# Altium PCB EG701_BMS.PcbDoc (part 1 of 2)
Units mm, origin at the board's own origin, x right, y up, seen from the top; angles counter-clockwise.
Board outline 90 x 50 mm, 2 copper layers (Top Layer, Bottom Layer); 94 components, 53 nets, 237 pads, 123 vias.
Unrouted connection lines stored in the file: 37.
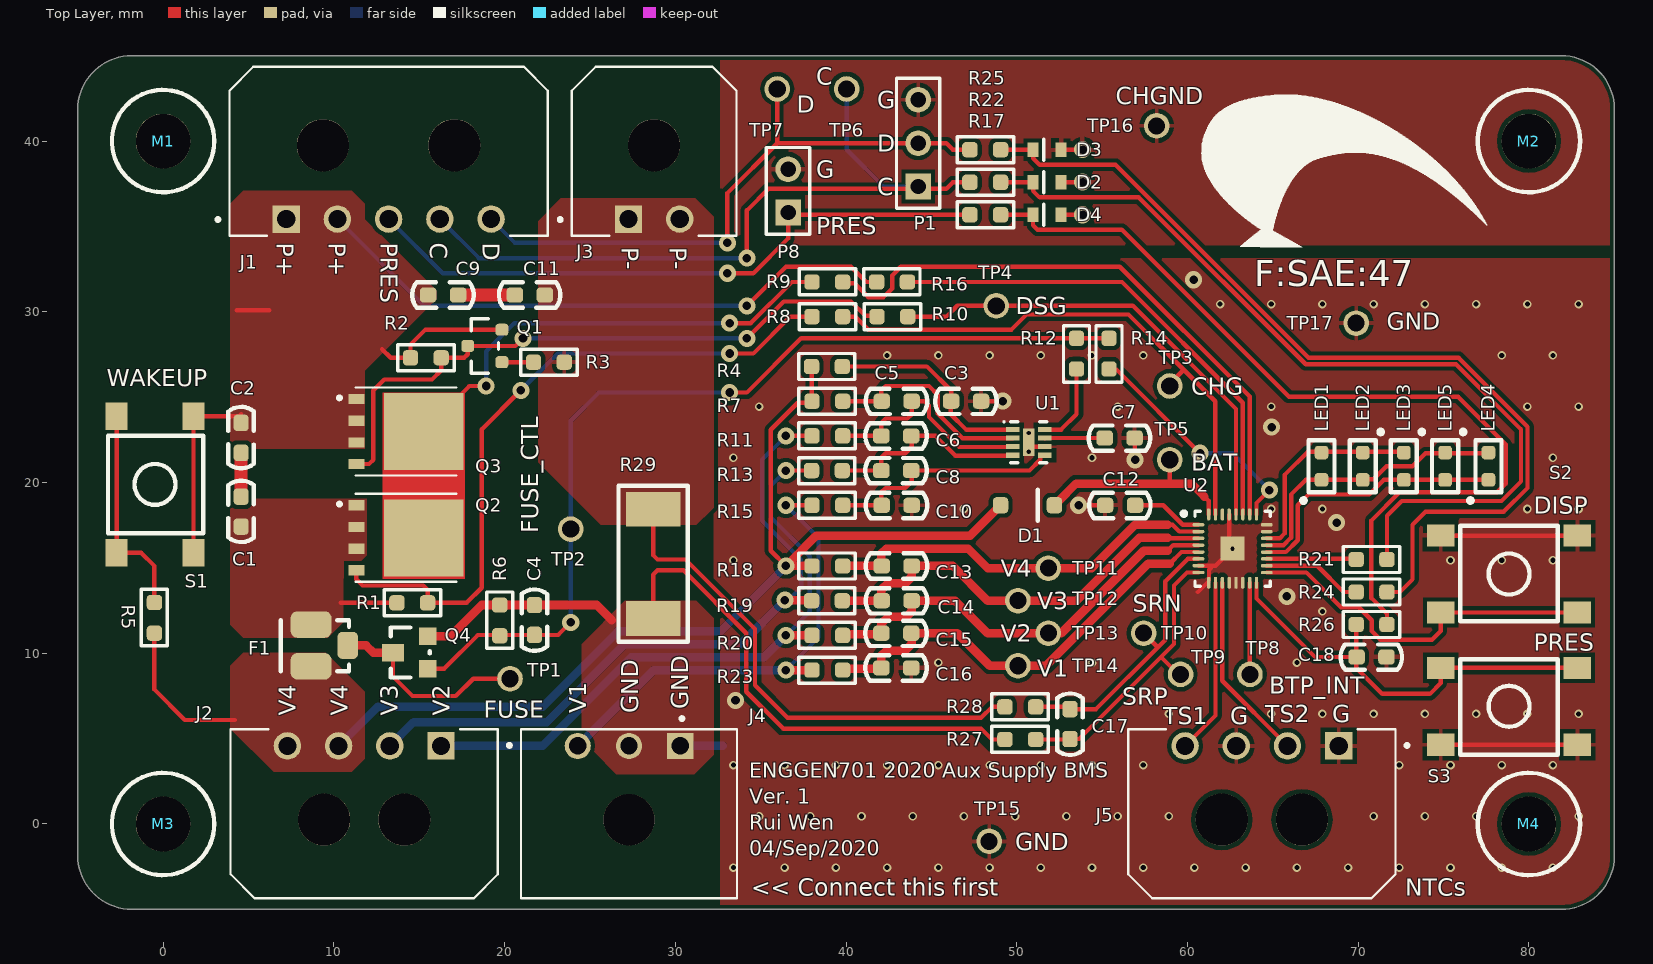
[diagram p0: Top Layer view]
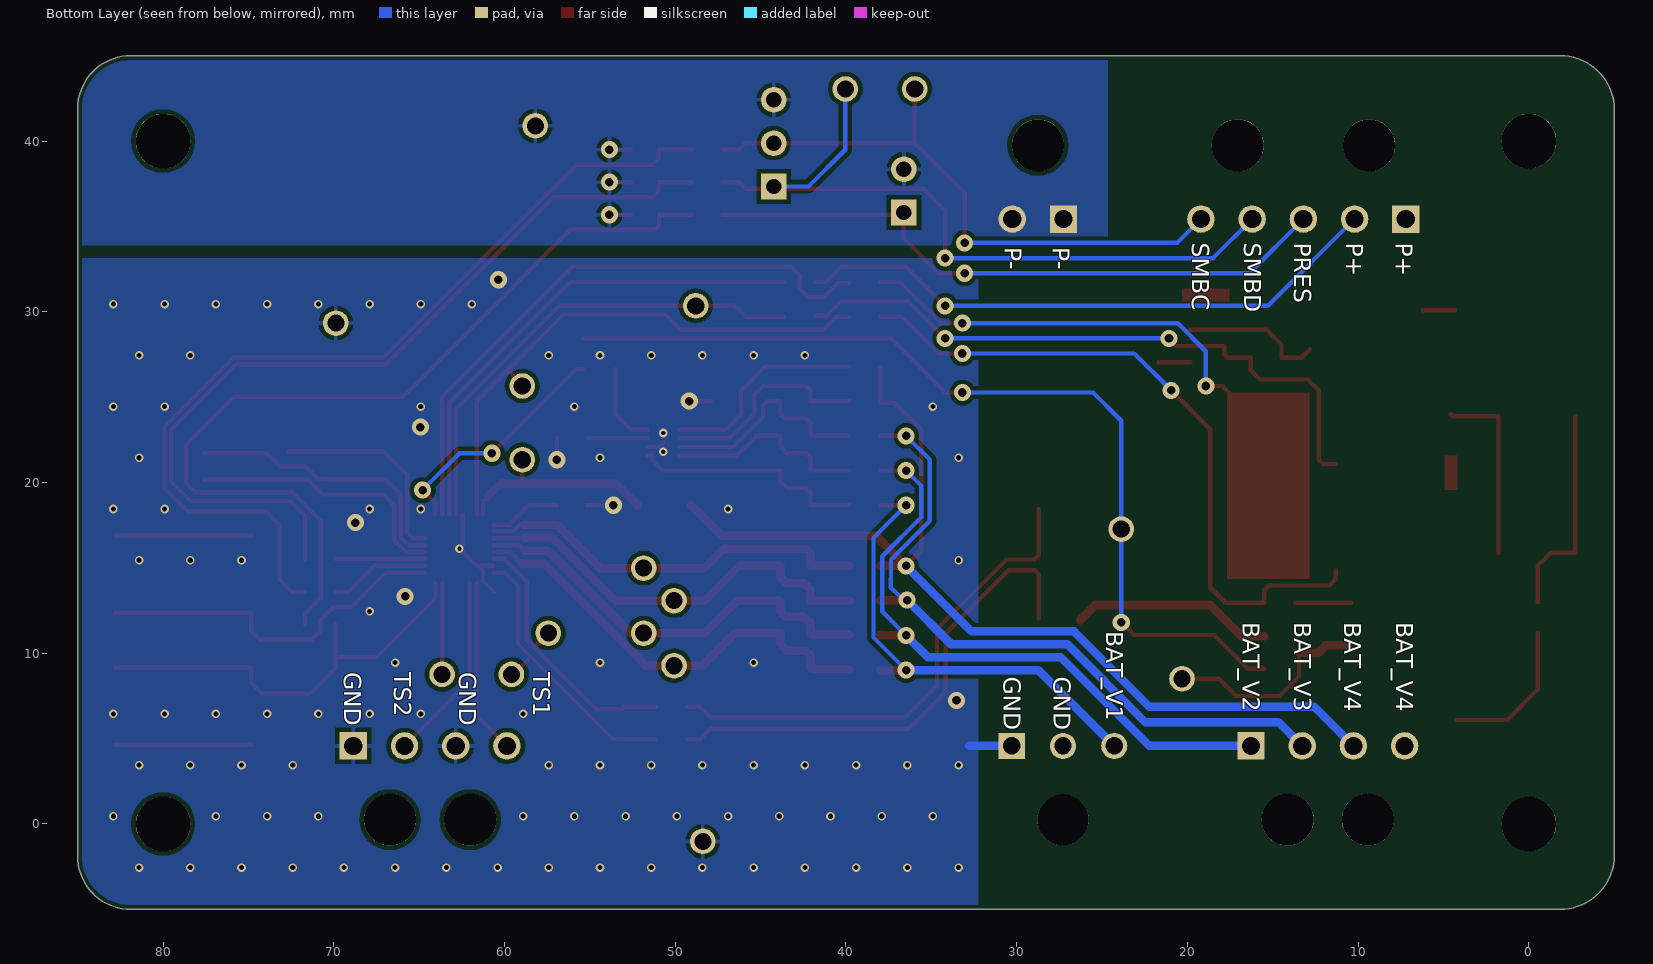
[diagram p1: Bottom Layer view, seen from below]

## Layer stack, top to bottom
Top Solder: solder mask 0.0102, Solder Resist, Dk 3.5
Top Layer: signal copper 0.0356
Dielectric 1: dielectric 0.32, FR-4, Dk 4.8
Bottom Layer: signal copper 0.0356
Bottom Solder: solder mask 0.0102, Solder Resist, Dk 3.5

## Board outline
-5,-1.825 -5,41.83 cw(c-1.83,41.83) -1.83,45 81.906,45 cw(c81.906,41.906) 85,41.906 85,-1.901 cw(c81.901,-1.901) 81.901,-5 -1.825,-5 cw(c-1.825,-1.825)

## Design rules (kind name [scope] priority, off if disabled: settings)
BoardOutlineClearance [All] p1: gap=0.254 ignorepadtopadclearanceinfootprint=FALSE except(0: Arc-SplitContinuation Track-SplitContinuation SMDPad-SplitContinuation THPad-SplitContinuation Via-SplitContinuation Fill-SplitContinuation Poly-SplitContinuation Region-SplitContinuation Text-SplitContinuation)
Clearance [All] p1: gap=0.254 ignorepadtopadclearanceinfootprint=FALSE except(0: Arc-Hole Track-Hole SMDPad-Hole THPad-Hole Via-Hole Fill-Hole Poly-Hole Region-Hole Text-Hole; 0.127: Arc-Arc Arc-Track Arc-SMDPad Track-Track Track-SMDPad SMDPad-SMDPad; 0.54: THPad-THPad)
PolygonConnect Relief_Power [InNet('BAT_V4') OR InNet('NetC1_1') OR InNet('NetC1_2') OR InNet('NetQ2_5') OR InNet('PACK+') OR     (InNet('GND') AND (InComponent('J4') OR InComponent('U1') OR InComponent('U2') OR InComponent('R29') OR IsVia))  OR   InNet('CHGND') AND (InComponent('J3') OR InComponent('C11') OR InComponent('R29'))] p1: connectstyle=Direct reliefconductorwidth=0.254 reliefentries=4 polygonreliefangle="90 Angle" airgapwidth=0.254
PolygonConnect [All] p2: connectstyle=Relief reliefconductorwidth=0.254 reliefentries=4 polygonreliefangle="90 Angle" airgapwidth=0.254
RoutingVias [All] p1: holewidth=0.711 width=1.27 viastyle="Through Hole" minholewidth=0.711 minwidth=1.27 maxholewidth=0.711 maxwidth=1.27
SolderMaskExpansion [All] p1: expansion=0.102
Width Width_FUSE [InNet('NetF1_2')] p1: maxlimit=0.5 minlimit=0.254 preferedwidth=0.254
Width Width_BAT [InNet('GND') OR InNet('BAT_V1') OR InNet('BAT_V2') OR InNet('BAT_V3') OR InNet('BAT_V4') OR InNet('VC1') OR InNet('VC2') OR InNet('VC3') OR InNet('VC4') OR InNet('BAT')] p2: maxlimit=0.5 minlimit=0.254 preferedwidth=0.254
Width [All] p3: maxlimit=0.254 minlimit=0.254 preferedwidth=0.254
30 further rules are at their usual default settings.

## Components (designator, comment, footprint, x,y, rotation, side; value= is the part's Value field where it differs from the comment)
C1 "100nF 50V" C0603_GENERIC 4.572,17.424 r90 top
C2 "100nF 50V" C0603_GENERIC 4.572,21.742 r90 top
C3 "100nF 50V" C0603_GENERIC 47.912,24.765 r180 top
C4 "100nF 50V" C0603_GENERIC 21.75,12.827 r270 top
C5 "100nF 16V" C0603_GENERIC 43.848,24.765 r180 top
C6 "100nF 16V" C0603_GENERIC 43.823,22.733 r180 top
C7 "100nF 50V" C0603_GENERIC 56.904,22.606 r180 top
C8 "100nF 16V" C0603_GENERIC 43.823,20.701 r180 top
C9 "100nF 50V" C0603_GENERIC 17.28,30.988 r180 top
C10 "100nF 16V" C0603_GENERIC 43.848,18.669 r180 top
C11 "100nF 50V" C0603_GENERIC 22.36,30.988 r180 top
C12 "2.2uF 25V" C0603_GENERIC 56.929,18.669 r180 top
C13 "100nF 16V" C0603_GENERIC 43.848,15.113 r180 top
C14 "100nF 16V" C0603_GENERIC 43.848,13.081 r180 top
C15 "100nF 16V" C0603_GENERIC 43.823,11.176 r180 top
C16 "100nF 16V" C0603_GENERIC 43.823,9.144 r180 top
C17 "100nF 16V" C0603_GENERIC 53.119,6.731 r270 top
C18 "DNP" C0603_GENERIC 71.658,9.779 r180 top
D1 "BAT46W-7-F" SOD-123_GENERIC 49.055,18.669 r0 top
D2 "MM3Z5V6ST1G" SOD_323_GENERIC 52.589,37.592 r180 top
D3 "MM3Z5V6ST1G" SOD_323_GENERIC 52.589,39.497 r180 top
D4 "MM3Z5V6ST1G" SOD_323_GENERIC 52.589,35.687 r180 top
F1 "Chemical fuse" ITV4030Lxxxx 8.669,11.684 r180 top
J1 "Micro-Fit RA HDR" 436500500 13.21,35.433 r180 top
J2 "Micro-Fit RA HDR" 436500400 16.281,4.574 r0 top
J3 "Micro-Fit RA HDR" 436500200 27.259,35.433 r180 top
J4 "Micro-Fit RA HDR" 436500300 30.29,4.572 r0 top
J5 "Micro-Fit RA HDR" 436500400 68.859,4.574 r0 top
LED1 "GREEN" LED_0603_GENERIC 67.851,20.955 r90 top
LED2 "GREEN" LED_0603_GENERIC 70.264,20.955 r270 top
LED3 "GREEN" LED_0603_GENERIC 72.677,20.955 r270 top
LED4 "GREEN" LED_0603_GENERIC 77.63,20.955 r90 top
LED5 "GREEN" LED_0603_GENERIC 75.09,20.955 r270 top
M1 "M3 Non-plated" M3_NONPLATED_GENERIC 0,40 r0 top locked
M2 "M3 Non-plated" M3_NONPLATED_GENERIC 80,40 r0 top locked
M3 "M3 Non-plated" M3_NONPLATED_GENERIC 0,0 r0 top locked
M4 "M3 Non-plated" M3_NONPLATED_GENERIC 80,0 r0 top locked
P1 "Header 3" HDR3_3D 44.229,37.338 r90 top
P8 "Header 2" HDR1X2 36.609,35.814 r90 top
Q1 "2N7002ET1G" SOT-23_GENERIC#1 17.845,28.001 r0 top
Q2 "BSC093N04LSG" TDSON-8 14.223,16.764 r0 top
Q3 "BSC093N04LSG" TDSON-8 14.223,22.987 r0 top
Q4 "PMV40UN2R" SOT-23_GENERIC#2 15.494,9.093 r90 top
R1 "1M" R0603_GENERIC 15.494,12.954 r180 top
R2 "1M" R0603_GENERIC 16.289,27.305 r180 top
R3 "10K" R0603_GENERIC 23.495,27.051 r180 top
R4 "100R" R0603_GENERIC 37.984,26.797 r0 top
R5 "10K" R0603_GENERIC -0.508,12.976 r270 top
R6 "51K" R0603_GENERIC 19.718,12.827 r270 top
R7 "1K" R0603_GENERIC 38.006,24.765 r0 top
R8 "5.1K" R0603_GENERIC 39.806,29.718 r180 top
R9 "100R" R0603_GENERIC 39.806,31.75 r180 top
R10 "5.1K" R0603_GENERIC 43.616,29.718 r180 top
R11 "1K" R0603_GENERIC 38.006,22.733 r0 top
R12 "5.1K" R0603_GENERIC 53.5,26.648 r90 top
R13 "1K" R0603_GENERIC 37.984,20.701 r0 top
R14 "5.1K" R0603_GENERIC 55.405,26.648 r90 top
R15 "1K" R0603_GENERIC 38.006,18.669 r0 top
R16 "10K" R0603_GENERIC 41.794,31.75 r0 top
R17 "1K" R0603_GENERIC 49.055,35.687 r180 top
R18 "100R" R0603_GENERIC 38.006,15.113 r0 top
R19 "100R" R0603_GENERIC 37.984,13.081 r0 top
R20 "100R" R0603_GENERIC 38.006,11.049 r0 top
R21 "200R" R0603_GENERIC 69.883,15.494 r0 top
R22 "100R" R0603_GENERIC 49.055,37.592 r180 top
R23 "100R" R0603_GENERIC 38.006,9.017 r0 top
R24 "200R" R0603_GENERIC 69.883,13.589 r0 top
R25 "100R" R0603_GENERIC 49.055,39.497 r180 top
R26 "200R" R0603_GENERIC 69.883,11.684 r0 top
R27 "100R" R0603_GENERIC 49.309,4.953 r0 top
R28 "100R" R0603_GENERIC 49.309,6.858 r0 top
R29 "1mR 50ppm" R2512_M_GENERIC 28.702,15.24 r90 top
S1 "SMT Tact Switch" 41-KRSM6-1 -2.722,23.892 r90 top
S2 "SMT Tact Switch" 41-KRSM6-1 74.836,12.391 r180 top
S3 "SMT Tact Switch" 41-KRSM6-1 82.837,9.144 r0 top
TP1 "Test Point TH" TP_5021 20.32,8.509 r0 top
TP2 "Test Point TH" TP_5021 23.876,17.272 r180 top
TP3 "Test Point TH" TP_5021 58.961,25.654 r180 top
TP4 "Test Point TH" TP_5021 48.801,30.353 r180 top
TP5 "Test Point TH" TP_5021 58.961,21.336 r90 top
TP6 "Test Point TH" TP_5021 40.038,43.053 r270 top
TP7 "Test Point TH" TP_5021 35.974,43.053 r270 top
TP8 "Test Point TH" TP_5021 63.66,8.763 r180 top
TP9 "Test Point TH" TP_5021 59.596,8.763 r180 top
TP10 "Test Point TH" TP_5021 57.437,11.176 r180 top
TP11 "Test Point TH" TP_5021 51.849,14.986 r180 top
TP12 "Test Point TH" TP_5021 50.071,13.081 r180 top
TP13 "Test Point TH" TP_5021 51.849,11.176 r180 top
TP14 "Test Point TH" TP_5021 50.071,9.271 r180 top
TP15 "Test Point TH" TP_5021 48.387,-1.016 r180 top
TP16 "Test Point TH" TP_5021 58.199,40.894 r90 top
TP17 "Test Point TH" TP_5021 69.883,29.337 r90 top
U1 "BQ294700DSGR" SON50P200X80_HS-9N 50.706,22.352 r0 top
U2 "BQ40Z50RSMR-R2" QFN40P400X400X100_HS-33N 62.644,16.129 r0 top

## Footprints (in the part's own frame and the unit in brackets; to place one, negate y for a bottom-side part, rotate by r counter-clockwise, add the part's x,y. Pads: shape width x height; smd on the part's side, far side on the other; paste and mask are expansions set on the pad)
41-KRSM6-1 [mm] "https://www.hiq.co.nz/sites/default/files/product_documents/KRSM6/Keypad%20Switches%2002.pdf"
  rect 1.6x1.3 smd: 1(-8,0) 1(0,0) 2(-8,-4.5) 2(0,-4.5)
  silkscreen extent -6.86,-5.08 -1.14,0.51, body extent -8.49,-5.24 0.51,0.76, height 4.3
436500200 [mm] "Molex MicroFit RA 2P"
  rect 1.605x1.605 hole 1.07: 1(0,0)
  round 1.605 hole 1.07: 2(-3,0)
  round 3.05 hole 3.05 unplated: ""(-1.5,-4.32)
  silkscreen extent -6.32,-8.92 4.1,0.98, body extent -6.32,-8.92 3.33,0.98, height 5.64
436500300 [mm] "Molex MicroFit RA 3P"
  rect 1.53x1.53 hole 1.02: 1(0,0)
  round 1.53 hole 1.02: 2(-3,0) 3(-6,0)
  round 3 hole 3 unplated: ""(-3,-4.32)
  silkscreen extent -9.32,-8.92 3.32,1.7, body extent -9.32,-8.89 3.33,1.01, height 5.64
436500400 [mm] "MOLEX MicroFit RA 4P"
  rect 1.605x1.605 hole 1.07: 1(0,0)
  round 1.605 hole 1.07: 2(-3,0) 3(-6,0) 4(-9,0)
  round 3.05 hole 3.05 unplated: ""(-6.85,-4.32) ""(-2.15,-4.32)
  silkscreen extent -12.33,-8.92 4.1,0.98, body extent -12.32,-8.92 3.33,0.98, height 5.64
436500500 [mm] "MOLEX MicroFit RA 5P"
  rect 1.605x1.605 hole 1.07: 1(6,0)
  round 1.605 hole 1.07: 2(3,0) 3(0,0) 4(-3,0) 5(-6,0)
  round 3.05 hole 3.05 unplated: ""(-3.85,-4.32) ""(3.85,-4.32)
  silkscreen extent -9.33,-8.92 10.1,0.98, body extent -9.29,-8.89 9.35,1.01, height 5.64
C0603_GENERIC [mil]
  rrect50% 38x35 smd: 1(0,0) 2(69,0)
  silkscreen extent -36,-29 106,30, body extent 4,-16 67,16, height 12
HDR1X2 [mm] "Connector; Header; 2 Position"
  rect 1.5x1.5 hole 0.9: 1(0,0)
  round 1.5 hole 0.9: 2(2.54,0)
  silkscreen extent -1.27,-1.27 3.81,1.27
HDR3_3D [mm] "Connector; Header; 3 Position"
  rect 1.5x1.5 hole 0.9: 1(0,0)
  round 1.5 hole 0.9: 2(2.54,0) 3(5.08,0)
  silkscreen extent -1.27,-1.27 6.35,1.27, body extent -1.27,-1.32 6.35,1.22, height 8.54
ITV4030Lxxxx [mm] "Battery Protector/Controllable Fuse"
  rrect50% 2.4x1.55 smd: 1(0,0) 3(0,2.45)
  rrect50% 1.2x1.6 smd: 2(-2.15,1.225)
  silkscreen extent -2.22,-0.25 1.78,2.75, body extent -2.16,-0.25 1.78,2.79, height 0.9
LED_0603_GENERIC [mm]
  rrect50% 0.8x0.8 smd: 1(0.8,0) 2(-0.8,0)
  silkscreen extent -2.13,-0.76 1.52,1.18, body extent -0.8,-0.4 0.8,0.4, height 0.7
M3_NONPLATED_GENERIC [mm] "Non-plated M3 mounting hole"
  round 3.2 hole 3.2 unplated: 0(0,0)
  silkscreen extent -3,-3 3,3
QFN40P400X400X100_HS-33N [mm] "QFN, 32-Leads, Body 4.00x4.00mm, Pitch 0.40mm, Thermal Pad 1.40x1.40mm, IPC Medium Density"
  oval 0.7x0.2 smd: 1(-2,1.4) 2(-2,1) 3(-2,0.6) 4(-2,0.2) 5(-2,-0.2) 6(-2,-0.6) 7(-2,-1) 8(-2,-1.4) 17(2,-1.4) 18(2,-1) 19(2,-0.6) 20(2,-0.2) 21(2,0.2) 22(2,0.6) 23(2,1) 24(2,1.4)
  oval 0.2x0.7 smd: 9(-1.4,-2) 10(-1,-2) 11(-0.6,-2) 12(-0.2,-2) 13(0.2,-2) 14(0.6,-2) 15(1,-2) 16(1.4,-2) 25(1.4,2) 26(1,2) 27(0.6,2) 28(0.2,2) 29(-0.2,2) 30(-0.6,2) 31(-1,2) 32(-1.4,2)
  rect 1.4x1.4 smd: 33(0,0)
  silkscreen extent -2.97,-2.2 2.2,2.2, body extent -2.05,-2.05 2.05,2.05, height 1
R0603_GENERIC [mm] "http://www.vishay.com/docs/28745/soldpads.pdf"
  rrect50% 0.9x0.9 smd: 1(0,0) 2(1.8,0)
  silkscreen extent -0.76,-0.76 2.54,0.76, body extent 0.1,-0.4 1.7,0.4, height 0.5
R2512_M_GENERIC [mm]
  rect 2.032x3.2 smd: 1(-3.2,0) 2(3.2,0)
  silkscreen extent -4.57,-2.03 4.57,2.03, body extent -3.2,-1.6 3.2,1.6, height 0.55
SOD-123_GENERIC [mm] "SMT diode"
  rrect50% 0.9x0.95 smd: 1(0,0) 2(3.15,0)
  silkscreen extent 2.17,-0.9 2.17,0.9, body extent 0.15,-0.85 3,0.85, height 1.36
SOD_323_GENERIC [mm] "SMT diode"
  rect 0.63x0.83 smd: 1(0,0) 2(1.64,0)
  silkscreen extent 1.02,-0.63 1.02,0.63, body extent -0.03,-0.63 1.67,0.63, height 1.05
SON50P200X80_HS-9N [mm] "SON, 8-Leads, Body 2.00x2.00mm, Pitch 0.50mm, Thermal Pad 1.60x0.69mm, IPC Medium Density"
  rect 0.8x0.3 smd: 1(-0.945,0.75) 2(-0.945,0.25) 3(-0.945,-0.25) 4(-0.945,-0.75) 5(0.945,-0.75) 6(0.945,-0.25) 7(0.945,0.25) 8(0.945,0.75)
  rect 0.69x1.6 smd: 9(0,0)
  silkscreen extent -1.5,-1.2 1.05,1.25, body extent -1.05,-1.05 1.05,1.05, height 0.8
SOT-23_GENERIC#1 [mm] "SMT generic footprint"
  rrect50% 0.75x0.7 smd: 1(2,0.95) 2(2,-0.95) 3(0,0)
  silkscreen extent 0.2,-1.6 1.8,1.6, body extent -0.25,-1.5 2.25,1.5, height 1.1
SOT-23_GENERIC#2 [mm]
  rect 1.016x1.016 smd: 1(0,0) 2(1.905,0)
  rect 1.016x1.27 smd: 3(0.94,2.032)
  silkscreen extent -0.51,-0.13 2.41,2.16, body extent -0.5,-0.3 2.4,2.5, height 1.2
TDSON-8 [mm] "Infineon MOSFETs"
  rect 0.95x0.6 smd: 1(-2.9,-0.635) 1(-2.9,0.635) 1(-2.9,1.905) 4(-2.9,-1.905)
  rect 4.65x4.51 smd: 5(1.05,0)
  silkscreen extent -3.99,-2.58 2.95,2.58, body extent -3.07,-2.67 3.08,2.68, height 1
TP_5021 [mm] "Test point, low profile"
  round 1.5 hole 1: 1(0,0)
  body extent -1.25,-0.25 1.25,0.25, height 2.6

## Part data
C1 C2 C3 C4 C7 C9 C11: library part "100nF_0603_10%_X8R_ 50V", "TDK - CGA3E3X8R1H104K080AB - Keramikvielschichtkondensator, SMD, 0.1 μF, 50 V, 0603 [Metrisch 1608], ± 10%, X8R, CGA Series", Capacitance=100nF, Case/Package=0603, Case Code (Metric)=1608, Dielectric=X8R, Manufacturer 1=TDK, Manufacturer Part Number 1=CGA3E3X8R1H104K080AB, Max Operating Temperature=150°C, Min Operating Temperature=-55°C, Package Quantity=4000, Ratings=AEC-Q200, Supplier Part Number 1=445-12606-1-ND, Tolerance=10%, Voltage Rating=50V, Case Code (Imperial)=0603, ComponentLink1Description=http://www.mouser.com/ds/2/400/tdk_mlcc_automotive_hightemp_en-549698.pdf?src-supplier=Mouser, ComponentLink1URL=http://www.mouser.com/ds/2/400/tdk_mlcc_automotive_hightemp_en-549698.pdf?src-supplier=Mouser, ComponentLink2Description=http://www.farnell.com/datasheets/2016103.pdf?src-supplier=Farnell, ComponentLink2URL=http://www.farnell.com/datasheets/2016103.pdf?src-supplier=Farnell, ComponentLink3Description=http://product.tdk.com/en/catalog/datasheets/mlcc_automotive_hightemp_en.pdf?src-supplier=Avnet, ComponentLink3URL=http://product.tdk.com/en/catalog/datasheets/mlcc_automotive_hightemp_en.pdf?src-supplier=Avnet, ComponentLink4Description=http://www.farnell.com/datasheets/2016103.pdf?src-supplier=Element14, ComponentLink4URL=http://www.farnell.com/datasheets/2016103.pdf?src-supplier=Element14, ComponentLink5Description=https://product.tdk.com/info/en/documents/chara_sheet/CGA3E3X8R1H104K080AB.pdf?src-supplier=Digi-Key, ComponentLink5URL=https://product.tdk.com/info/en/documents/chara_sheet/CGA3E3X8R1H104K080AB.pdf?src-supplier=Digi-Key, ComponentLink6Description=http://www.farnell.com/datasheets/2016103.pdf?src-supplier=Newark, ComponentLink6URL=http://www.farnell.com/datasheets/2016103.pdf?src-supplier=Newark, Features="High Temperature", Height=0.8mm, Lead Free="Lead Free", Length=0.063inch, Mount="Surface Mount", Packaging="Tape and Reel", Pricing 1="1=0.23000, 10=0.15900, 100=0.09030, 500=0.06376, 1000=0.05579 (USD)", REACH SVHC="No SVHC", RoHS=Yes, Stock 1=311729, Supplier 1=Digi-Key, Termination=SMD/SMT, Thickness=0.035inch, Voltage Rating (DC)=50V, Weight=7.1E-05oz, Width=0.8mm
C5 C6 C8 C10 C13 C14 C15 C16 C17: library part 100nF_0603_-20%+80%_Y5V_16V, "Cap Ceramic 0.1uF 16V Y5V -20% to 80% SMD 0603 85C Paper T/R", Capacitance=100nF, Case/Package=0603, Case Code (Metric)=1608, Dielectric=Y5V, Manufacturer 1=Samsung, Manufacturer Part Number 1=CL10F104ZO8NNNC, Max Operating Temperature=85°C, Min Operating Temperature=-30°C, Package Quantity=1, Supplier Part Number 1=1276-1258-1-ND, Tolerance=80%, Voltage Rating=16V, Case Code (Imperial)=0603, ComponentLink1Description=https://datasheet.ciiva.com/25805/cl10f104zo8nnnc-25805810.pdf?src-supplier=Digi-Key, ComponentLink1URL=https://datasheet.ciiva.com/25805/cl10f104zo8nnnc-25805810.pdf?src-supplier=Digi-Key, ComponentLink2Description=https://datasheet.ciiva.com/16199/cl10f104zo8nnnc-16199254.pdf?src-supplier=Future+Electronics, ComponentLink2URL=https://datasheet.ciiva.com/16199/cl10f104zo8nnnc-16199254.pdf?src-supplier=Future+Electronics, Depth=0.8mm, Height=0.8mm, Length=1.6mm, Mount="Surface Mount", Packaging="Tape and Reel", Pricing 1="1=0.10000, 10=0.03000, 100=0.01360, 500=0.00970, 1000=0.00762 (USD)", Radiation Hardening=No, RoHS=Yes, Stock 1=7637746, Supplier 1=Digi-Key, Thickness=0.035inch, Width=0.031inch
C12: library part 2U2_0603_10%_X5R_25V, "Ceramic capacitor SMD 0805 2.2 μF 25 V 10 %", Capacitance=2.2uF, Case/Package=0805, Case Code (Metric)=2012, Manufacturer 1=Samsung, Manufacturer Part Number 1=CL21A225KAFNNNG, Max Operating Temperature=85°C, Min Operating Temperature=-55°C, Package Quantity=3000, Supplier Part Number 1=1276-6458-1-ND, Tolerance=10%, Voltage Rating=25V, Case Code (Imperial)=0805, ComponentLink1Description=https://datasheet.ciiva.com/25730/cl21a225kafnnng-25730829.pdf?src-supplier=Digi-Key, ComponentLink1URL=https://datasheet.ciiva.com/25730/cl21a225kafnnng-25730829.pdf?src-supplier=Digi-Key, ComponentLink2Description=https://datasheet.ciiva.com/29199/455579-da-01-en-vs-kondensator-0805-29199247.pdf?src-supplier=Conrad, ComponentLink2URL=https://datasheet.ciiva.com/29199/455579-da-01-en-vs-kondensator-0805-29199247.pdf?src-supplier=Conrad, Length=0.079inch, Material=Ceramic, Mount="Surface Mount", Packaging="Tape and Reel", Pricing 1="1=0.15000, 10=0.10500, 50=0.05940, 100=0.04920, 500=0.03452, 1000=0.02858 (USD)", RoHS=Yes, Stock 1=290666, Supplier 1=Digi-Key, Thickness=0.053inch, Width=0.049inch
C18: library part SMT_CAP_GENERIC
D1: "Diode Schottky 100V 0.15A 2Pin SOD123", Average Rectified Current=150mA, Forward Voltage=1V, Manufacturer 1=Diodes, Max Forward Surge Current (Ifsm)=750mA, Max Operating Temperature=125°C, Max Repetitive Reverse Voltage (Vrrm)=100V, Min Operating Temperature=-55°C, Package Quantity=3000, Peak Reverse Current=2uA, Power Dissipation=200mW, Supplier Part Number 1=BAT46W-7FDICT-ND, ComponentLink1Description=https://datasheet.ciiva.com/4715/ds30044-73910-4715680.pdf?src-supplier=Mouser, ComponentLink1URL=https://datasheet.ciiva.com/4715/ds30044-73910-4715680.pdf?src-supplier=Mouser, ComponentLink2Description=https://datasheet.ciiva.com/16574/ds30044-16574286.pdf?src-supplier=Avnet+Europe, ComponentLink2URL=https://datasheet.ciiva.com/16574/ds30044-16574286.pdf?src-supplier=Avnet+Europe, ComponentLink3Description=https://datasheet.ciiva.com/8303/ds30044-8303137.pdf?src-supplier=Avnet, ComponentLink3URL=https://datasheet.ciiva.com/8303/ds30044-8303137.pdf?src-supplier=Avnet, ComponentLink4Description=https://datasheet.ciiva.com/6382/ds30044-6382981.pdf?src-supplier=Digi-Key, ComponentLink4URL=https://datasheet.ciiva.com/6382/ds30044-6382981.pdf?src-supplier=Digi-Key, ComponentLink5Description=https://datasheet.ciiva.com/22695/887886-22695798.pdf?src-supplier=Element14, ComponentLink5URL=https://datasheet.ciiva.com/22695/887886-22695798.pdf?src-supplier=Element14, ComponentLink6Description=https://datasheet.ciiva.com/6382/ds30044-6382985.pdf?src-supplier=Digi-Key, ComponentLink6URL=https://datasheet.ciiva.com/6382/ds30044-6382985.pdf?src-supplier=Digi-Key, ComponentLink7Description=https://datasheet.ciiva.com/15144/getdatasheetpartid-89219-15144635.pdf?src-supplier=Verical, ComponentLink7URL=https://datasheet.ciiva.com/15144/getdatasheetpartid-89219-15144635.pdf?src-supplier=Verical, ComponentLink8Description=https://datasheet.ciiva.com/16205/ds30044-16205030.pdf?src-supplier=Future+Electronics, ComponentLink8URL=https://datasheet.ciiva.com/16205/ds30044-16205030.pdf?src-supplier=Future+Electronics, ComponentLink9Description=https://datasheet.ciiva.com/6382/ds30044-6382983.pdf?src-supplier=Digi-Key, ComponentLink9URL=https://datasheet.ciiva.com/6382/ds30044-6382983.pdf?src-supplier=Digi-Key, ComponentLink10Description=https://datasheet.ciiva.com/1177/ds30044-1177855.pdf?src-supplier=Element14, ComponentLink10URL=https://datasheet.ciiva.com/1177/ds30044-1177855.pdf?src-supplier=Element14, Contact Plating=Tin,Matte, Element Configuration=Single, Forward Current=150mA, Height=1.25mm, Lead Free="Lead Free", Length=2.85mm, Manufacturer Part Number 1=BAT46W-7-F, Max Reverse Voltage (DC)=100V, Number of Pins=2, Packaging="Tape and Reel", Peak Non-Repetitive Surge Current=750mA, Power Rating=200mW, Pricing 1="1=0.38000, 10=0.28300, 25=0.24760, 100=0.13430, 250=0.13364, 500=0.10958, 1000=0.08131 (USD)", Radiation Hardening=No, REACH SVHC="No SVHC", RoHS=Yes, Stock 1=64763, Supplier 1=Digi-Key, Weight=0.000353oz, Width=1.7mm
D2 D3 D4: "DIODE ZENER 5.6V 200MW SOD323", Case/Package=SOD-323-2, Forward Voltage=900mV, Manufacturer 1="ON Semiconductor", Max Operating Temperature=150°C, Max Power Dissipation=200mW, Max Reverse Leakage Current=1uA, Min Operating Temperature=-65°C, Package Quantity=1, Supplier Part Number 1=MM3Z5V6ST1GOSCT-ND, Test Current=5mA, Tolerance=2%, Voltage Rating (DC)=5.6V, Zener Current=10mA, ComponentLink1Description=https://datasheet.ciiva.com/894/mm3z2v4st1-d-894656.pdf?src-supplier=Digi-Key, ComponentLink1URL=https://datasheet.ciiva.com/894/mm3z2v4st1-d-894656.pdf?src-supplier=Digi-Key, ComponentLink2Description=https://datasheet.ciiva.com/30478/0900766b8127c8bd-30478396.pdf?src-supplier=RSComponents, ComponentLink2URL=https://datasheet.ciiva.com/30478/0900766b8127c8bd-30478396.pdf?src-supplier=RSComponents, ComponentLink3Description=https://datasheet.ciiva.com/15141/getdatasheetpartid-38592-15141978.pdf?src-supplier=Verical, ComponentLink3URL=https://datasheet.ciiva.com/15141/getdatasheetpartid-38592-15141978.pdf?src-supplier=Verical, ComponentLink4Description=https://datasheet.ciiva.com/894/mm3z2v4st1-d-894657.pdf?src-supplier=Digi-Key, ComponentLink4URL=https://datasheet.ciiva.com/894/mm3z2v4st1-d-894657.pdf?src-supplier=Digi-Key, ComponentLink5Description=https://datasheet.ciiva.com/26093/mm3z2v4st1-d-26093062.pdf?src-supplier=Avnet+Europe, ComponentLink5URL=https://datasheet.ciiva.com/26093/mm3z2v4st1-d-26093062.pdf?src-supplier=Avnet+Europe, ComponentLink6Description=https://datasheet.ciiva.com/894/mm3z2v4st1-d-894655.pdf?src-supplier=Digi-Key, ComponentLink6URL=https://datasheet.ciiva.com/894/mm3z2v4st1-d-894655.pdf?src-supplier=Digi-Key, ComponentLink7Description=https://datasheet.ciiva.com/16202/mm3z2v4t1-d-16202392.pdf?src-supplier=Future+Electronics, ComponentLink7URL=https://datasheet.ciiva.com/16202/mm3z2v4t1-d-16202392.pdf?src-supplier=Future+Electronics, Contact Plating=Tin,Matte, Element Configuration=Single, ESD Protection=Yes, Height=1mm, Impedance=40R, Lead Free="Lead Free", Length=1.8mm, Manufacturer Part Number 1=MM3Z5V6ST1G, Material=Plastic, Number of Pins=2, Packaging="Tape and Reel", Peak Reverse Current=1uA, Power Dissipation=200mW, Power Rating=200mW, Pricing 1="1=0.13000, 10=0.11800, 25=0.11240, 100=0.04950, 250=0.04752, 500=0.03888, 1000=0.02700 (USD)", Radiation Hardening=No, REACH SVHC="No SVHC", RoHS=Yes, Stock 1=337246, Supplier 1=Digi-Key, Voltage Tolerance=2%, Width=1.35mm, Working Voltage=5.6V, Zener Voltage=5.6V
F1: library part ITV4030L1412, "36V 12A controllable fuse", Manufacturer 1=Littelfuse, Supplier Part Number 1=18-ITV4030L1412CT-ND, ComponentLink1Description=datasheet, ComponentLink1URL=https://m.littelfuse.com/~/media/electronics/datasheets/resettable_ptcs/littelfuse_battery_protectors_itv4030_12a_datasheet.pdf.pdf, Manufacturer Part Number 1=ITV4030L1412, Pricing 1="1=4.52000, 5=4.36400, 10=4.20800, 50=3.27260, 100=2.72710, 250=2.64924, 500=2.25964, 1000=2.14276 (USD)", RoHS=No, Stock 1=4981, Supplier 1=Digi-Key
J1: library part 43650-0500, "CONN HEADER R/A 5POS 3MM", Color=Black, Current Rating=5A, Flammability Rating="UL94 V-0", Manufacturer 1="Molex Waldom", Supplier Part Number 1=WM1863-ND, Voltage Rating (DC)=250V, ComponentLink1Description=https://datasheet.ciiva.com/24411/0436500500-pcb-headers-24411329.pdf?src-supplier=Onlinecomponents.com, ComponentLink1URL=https://datasheet.ciiva.com/24411/0436500500-pcb-headers-24411329.pdf?src-supplier=Onlinecomponents.com, Contact Material=Brass, Contact Plating=Tin, Gender=Male, Glow Wire Compliant=Compliant, Halogen Free="Low Halogen", Height=4.37mm, Housing Color=Black, Housing Material=Thermoplastic, Lead Free="Contains Lead", Length=18.6mm, Manufacturer Part Number 1=43650-0500, Number of Circuits=5, Number of Contacts=5, Number of Positions=5, Number of Rows=1, Orientation="Right Angle", Packaging=Tray, Pricing 1="1=1.54000, 10=1.39500, 100=1.19550, 500=0.99628, 1000=0.85395, 5000=0.75717, 10000=0.74009 (USD)", RoHS=No, Stock 1=4169, Supplier 1=Digi-Key, Width=9.9mm
J2 J5: library part 43650-0400, "MOLEX         43650-0400             Wire-To-Board Connector, Micro-Fit 3.0 43650 Series, Solder, Header, 4 Contacts, 3 mm", Color=Black, Contact Resistance=10mR, Current Rating=5A, Flammability Rating="UL94 V-0", Manufacturer 1=Molex, Max Operating Temperature=105°C, Max Voltage Rating (AC)=600V, Min Operating Temperature=-40°C, Package Quantity=2380, Supplier Part Number 1=WM1862-ND, Voltage Rating (DC)=250V, ComponentLink1Description=https://datasheet.ciiva.com/11748/0900766b80d6135b-11748178.pdf?src-supplier=RSComponents, ComponentLink1URL=https://datasheet.ciiva.com/11748/0900766b80d6135b-11748178.pdf?src-supplier=RSComponents, ComponentLink2Description=https://datasheet.ciiva.com/16085/0436500400-pcb-headers-16085752.pdf?src-supplier=Onlinecomponents.com, ComponentLink2URL=https://datasheet.ciiva.com/16085/0436500400-pcb-headers-16085752.pdf?src-supplier=Onlinecomponents.com, ComponentLink3Description=https://datasheet.ciiva.com/5151/0436500400-pcb-headers-148663-5151881.pdf?src-supplier=Mouser, ComponentLink3URL=https://datasheet.ciiva.com/5151/0436500400-pcb-headers-148663-5151881.pdf?src-supplier=Mouser, ComponentLink4Description=https://datasheet.ciiva.com/19462/884184-19462234.pdf?src-supplier=Jameco, ComponentLink4URL=https://datasheet.ciiva.com/19462/884184-19462234.pdf?src-supplier=Jameco, ComponentLink5Description=https://datasheet.ciiva.com/9449/0436500400-pcb-headers-9449446.pdf?src-supplier=Avnet, ComponentLink5URL=https://datasheet.ciiva.com/9449/0436500400-pcb-headers-9449446.pdf?src-supplier=Avnet, ComponentLink6Description=https://datasheet.ciiva.com/17080/70266896-17080471.pdf?src-supplier=Allied+Electronics, ComponentLink6URL=https://datasheet.ciiva.com/17080/70266896-17080471.pdf?src-supplier=Allied+Electronics, ComponentLink7Description=https://datasheet.ciiva.com/16654/0436500400-pcb-headers-16654968.pdf?src-supplier=Avnet+Europe, ComponentLink7URL=https://datasheet.ciiva.com/16654/0436500400-pcb-headers-16654968.pdf?src-supplier=Avnet+Europe, ComponentLink8Description=https://datasheet.ciiva.com/7094/1946229-7094763.pdf?src-supplier=Newark, ComponentLink8URL=https://datasheet.ciiva.com/7094/1946229-7094763.pdf?src-supplier=Newark, ComponentLink9Description=https://datasheet.ciiva.com/30221/142510436500400-pcb-headers-30221164.pdf?src-supplier=Onlinecomponents.com, ComponentLink9URL=https://datasheet.ciiva.com/30221/142510436500400-pcb-headers-30221164.pdf?src-supplier=Onlinecomponents.com, Connector Type=Plug,Socket, Contact Material="Brass,Copper Alloy", Contact Plating=Tin,Bright, Depth=3.6mm, Gender=Male, Glow Wire Compliant=Compliant, Halogen Free="Low Halogen", Height=4.5mm, Housing Color=Black, Housing Material=Thermoplastic, Lead Free="Contains Lead", Length=14.86mm, Manufacturer Part Number 1=43650-0400, Mount="Through Hole,Cable", Number of Circuits=4, Number of Contacts=4, Number of Positions=4, Number of Rows=1, Orientation="Right Angle", Packaging=Tray, Pitch=3mm, Pricing 1="1=1.36000, 10=1.23000, 100=1.05400, 500=0.87832, 1000=0.75285, 5000=0.66753, 10000=0.65247 (USD)", Radiation Hardening=No, REACH SVHC=Unknown, RoHS=Yes, Stock 1=6849, Supplier 1=Digi-Key, Termination=Solder, Voltage Rating=600V
J3: library part 43650-0200, "MOLEX   43650-0200   HEADER, R/A, SINGLE ROW, 2 WAY", Color=Black, Contact Resistance=10mR, Current Rating=5A, Flammability Rating="UL94 V-0", Insulation Resistance=1GR, Manufacturer 1=Molex, Max Operating Temperature=105°C, Min Operating Temperature=-40°C, Package Quantity=3927, Supplier Part Number 1=WM1860-ND, Voltage Rating=600V, Voltage Rating (AC)=250V, ComponentLink1Description=https://datasheet.ciiva.com/14155/04402066-14155224.pdf?src-supplier=Distrelec, ComponentLink1URL=https://datasheet.ciiva.com/14155/04402066-14155224.pdf?src-supplier=Distrelec, ComponentLink2Description=https://datasheet.ciiva.com/5158/0436500200-pcb-headers-148844-5158523.pdf?src-supplier=Mouser, ComponentLink2URL=https://datasheet.ciiva.com/5158/0436500200-pcb-headers-148844-5158523.pdf?src-supplier=Mouser, ComponentLink3Description=https://datasheet.ciiva.com/11748/0900766b80d6135b-11748140.pdf?src-supplier=RSComponents, ComponentLink3URL=https://datasheet.ciiva.com/11748/0900766b80d6135b-11748140.pdf?src-supplier=RSComponents, ComponentLink4Description=https://datasheet.ciiva.com/22683/1709823-22683551.pdf?src-supplier=Element14, ComponentLink4URL=https://datasheet.ciiva.com/22683/1709823-22683551.pdf?src-supplier=Element14, ComponentLink5Description=https://datasheet.ciiva.com/30161/48630436500200-pcb-headers-30161343.pdf?src-supplier=Onlinecomponents.com, ComponentLink5URL=https://datasheet.ciiva.com/30161/48630436500200-pcb-headers-30161343.pdf?src-supplier=Onlinecomponents.com, ComponentLink6Description=https://datasheet.ciiva.com/9432/0436500200-pcb-headers-9432849.pdf?src-supplier=Avnet, ComponentLink6URL=https://datasheet.ciiva.com/9432/0436500200-pcb-headers-9432849.pdf?src-supplier=Avnet, ComponentLink7Description=https://datasheet.ciiva.com/16089/1029720436500200-pcb-headers-16089218.pdf?src-supplier=Onlinecomponents.com, ComponentLink7URL=https://datasheet.ciiva.com/16089/1029720436500200-pcb-headers-16089218.pdf?src-supplier=Onlinecomponents.com, ComponentLink8Description=https://datasheet.ciiva.com/7920/1839562-7920756.pdf?src-supplier=Element14, ComponentLink8URL=https://datasheet.ciiva.com/7920/1839562-7920756.pdf?src-supplier=Element14, ComponentLink9Description=https://datasheet.ciiva.com/19462/884053-19462312.pdf?src-supplier=Jameco, ComponentLink9URL=https://datasheet.ciiva.com/19462/884053-19462312.pdf?src-supplier=Jameco, ComponentLink10Description=https://datasheet.ciiva.com/16654/0436500200-pcb-headers-16654958.pdf?src-supplier=Avnet+Europe, ComponentLink10URL=https://datasheet.ciiva.com/16654/0436500200-pcb-headers-16654958.pdf?src-supplier=Avnet+Europe, Connector Type=Plug,Socket, Contact Material=Brass,Tin, Contact Plating=Tin, Depth=9.9mm, Gender=Male, Glow Wire Compliant=Compliant, Halogen Free="Low Halogen", Height=5.57mm, Housing Color=Black, Housing Material=Thermoplastic, Lead Free="Lead Free", Length=9.65mm, Manufacturer Part Number 1=43650-0200, Mount="Through Hole", Number of Circuits=2, Number of Contacts=2, Number of Positions=2, Number of Rows=1, Orientation="Right Angle", Packaging=Tray, Pitch=3mm, Pricing 1="1=0.96000, 10=0.84100, 100=0.72560, 500=0.59364, 1000=0.52768, 5000=0.46172, 10000=0.43863 (USD)", Radiation Hardening=No, REACH SVHC=Unknown, RoHS=Yes, Stock 1=15790, Supplier 1=Digi-Key, Termination=Solder, Voltage Rating (DC)=250V, Working Voltage=250V
J4: library part 43650-0300, "MOLEX - 43650-0300 - Wire-To-Board-Steckverbinder, 3 mm, 3 Kontakt(e), Stiftleiste, Baureihe Micro-Fit 3.0 43650", Color=Black, Contact Resistance=10mR, Current Rating=5A, Flammability Rating="UL94 V-0", Insulation Resistance=1GR, Manufacturer 1=Molex, Max Operating Temperature=105°C, Max Voltage Rating (AC)=250V, Min Operating Temperature=-40°C, Package Quantity=2975, Supplier Part Number 1=WM1861-ND, Voltage Rating=600V, ComponentLink1Description=https://datasheet.ciiva.com/30189/0436500300-pcb-headers-30189026.pdf?src-supplier=Onlinecomponents.com, ComponentLink1URL=https://datasheet.ciiva.com/30189/0436500300-pcb-headers-30189026.pdf?src-supplier=Onlinecomponents.com, ComponentLink2Description=https://datasheet.ciiva.com/16089/437910436500300-pcb-headers-16089189.pdf?src-supplier=Onlinecomponents.com, ComponentLink2URL=https://datasheet.ciiva.com/16089/437910436500300-pcb-headers-16089189.pdf?src-supplier=Onlinecomponents.com, ComponentLink3Description=https://datasheet.ciiva.com/5153/0436500300-pcb-headers-148847-5153495.pdf?src-supplier=Mouser, ComponentLink3URL=https://datasheet.ciiva.com/5153/0436500300-pcb-headers-148847-5153495.pdf?src-supplier=Mouser, ComponentLink4Description=https://datasheet.ciiva.com/11747/0900766b80d6135b-11747857.pdf?src-supplier=RSComponents, ComponentLink4URL=https://datasheet.ciiva.com/11747/0900766b80d6135b-11747857.pdf?src-supplier=RSComponents, ComponentLink5Description=https://datasheet.ciiva.com/16654/0436500300-pcb-headers-16654467.pdf?src-supplier=Avnet+Europe, ComponentLink5URL=https://datasheet.ciiva.com/16654/0436500300-pcb-headers-16654467.pdf?src-supplier=Avnet+Europe, ComponentLink6Description=https://datasheet.ciiva.com/19462/884141-19462202.pdf?src-supplier=Jameco, ComponentLink6URL=https://datasheet.ciiva.com/19462/884141-19462202.pdf?src-supplier=Jameco, ComponentLink7Description=https://datasheet.ciiva.com/9432/0436500300-pcb-headers-9432853.pdf?src-supplier=Avnet, ComponentLink7URL=https://datasheet.ciiva.com/9432/0436500300-pcb-headers-9432853.pdf?src-supplier=Avnet, Connector Type=Power,Rectangular, Contact Material=Brass,Tin, Contact Plating=Tin,Lead,Bright, Depth=9.9mm, Gender=Male, Glow Wire Compliant=Compliant, Halogen Free="Low Halogen", Height=14.4mm, Housing Color=Black, Housing Material=Thermoplastic, Lead Free="Lead Free", Length=12.65mm, Manufacturer Part Number 1=43650-0300, Max Current Rating=5A, Mount="Through Hole,PCB", Number of Circuits=3, Number of Contacts=3, Number of Poles=3, Number of Positions=3, Number of Rows=1, Orientation="Right Angle", Packaging=Tray, Pitch=3mm, Pricing 1="1=1.10000, 10=0.96400, 100=0.83160, 500=0.68040, 1000=0.60480, 5000=0.52920, 10000=0.50274 (USD)", Radiation Hardening=No, REACH SVHC=Unknown, RoHS=Yes, Stock 1=35363, Supplier 1=Digi-Key, Termination=Solder, Voltage Rating (AC)=250V, Voltage Rating (DC)=250V, Working Voltage=250V
LED1 LED2 LED4 LED5: library part 150060VS75000, "WURTH ELEKTRONIK - 150060VS75000 - LED, 0603, B GREEN,  40MCD, 570NM", Case/Package=0603, Case Code (Metric)=1608, Color=Green, Forward Current=30mA, Forward Voltage=2V, Manufacturer 1="Wurth Electronics", Max Operating Temperature=85°C, Min Operating Temperature=-40°C, Package Quantity=1, Test Current=20mA, Case Code (Imperial)=0603, ComponentLink1Description=https://datasheet.ciiva.com/23843/150060vs75000-23843249.pdf?src-supplier=Newark, ComponentLink1URL=https://datasheet.ciiva.com/23843/150060vs75000-23843249.pdf?src-supplier=Newark, ComponentLink2Description=https://datasheet.ciiva.com/29279/759431-da-01-en-chipled-0603-w-kl-h-gruen-150060vs7500-29279199.pdf?src-supplier=Conrad, ComponentLink2URL=https://datasheet.ciiva.com/29279/759431-da-01-en-chipled-0603-w-kl-h-gruen-150060vs7500-29279199.pdf?src-supplier=Conrad, ComponentLink3Description=https://datasheet.ciiva.com/29562/150060vs75000-29562919.pdf?src-supplier=Digi-Key, ComponentLink3URL=https://datasheet.ciiva.com/29562/150060vs75000-29562919.pdf?src-supplier=Digi-Key, ComponentLink4Description=https://datasheet.ciiva.com/29562/150060vs75000-29562920.pdf?src-supplier=Digi-Key, ComponentLink4URL=https://datasheet.ciiva.com/29562/150060vs75000-29562920.pdf?src-supplier=Digi-Key, ComponentLink5Description=https://datasheet.ciiva.com/29562/150060vs75000-29562921.pdf?src-supplier=Digi-Key, ComponentLink5URL=https://datasheet.ciiva.com/29562/150060vs75000-29562921.pdf?src-supplier=Digi-Key, ComponentLink6Description=https://datasheet.ciiva.com/48430/150060vs75000-eng-tds-48430043.pdf?src-supplier=Distrelec, ComponentLink6URL=https://datasheet.ciiva.com/48430/150060vs75000-eng-tds-48430043.pdf?src-supplier=Distrelec, Dominant Wavelength=570nm, Height=0.7mm, Length=1.6mm, Lens Style=Clear,Rectangular, Luminous Intensity=40mcd, Manufacturer Part Number 1=150060VS75000, Mount="Surface Mount", Number of Pins=2, Packaging="Tape and Reel", Pricing 1="1=0.14000, 50=0.13300, 100=0.11400, 500=0.09900 (USD)", REACH SVHC=Unknown, RoHS=Yes, Stock 1=61699, Supplier 1=Digi-Key, Viewing Angle=140°, Wavelength=570nm, Width=0.8mm
LED3: library part 150060VS75000, "WURTH ELEKTRONIK - 150060VS75000 - LED, 0603, B GREEN,  40MCD, 570NM", Case/Package=0603, Case Code (Metric)=1608, Color=Green, Forward Current=30mA, Forward Voltage=2V, Manufacturer 1="Wurth Electronics", Max Operating Temperature=85°C, Min Operating Temperature=-40°C, Package Quantity=1, Supplier Part Number 1=732-4980-1-ND, Test Current=20mA, Case Code (Imperial)=0603, ComponentLink1Description=https://datasheet.ciiva.com/23843/150060vs75000-23843249.pdf?src-supplier=Newark, ComponentLink1URL=https://datasheet.ciiva.com/23843/150060vs75000-23843249.pdf?src-supplier=Newark, ComponentLink2Description=https://datasheet.ciiva.com/29279/759431-da-01-en-chipled-0603-w-kl-h-gruen-150060vs7500-29279199.pdf?src-supplier=Conrad, ComponentLink2URL=https://datasheet.ciiva.com/29279/759431-da-01-en-chipled-0603-w-kl-h-gruen-150060vs7500-29279199.pdf?src-supplier=Conrad, ComponentLink3Description=https://datasheet.ciiva.com/29562/150060vs75000-29562919.pdf?src-supplier=Digi-Key, ComponentLink3URL=https://datasheet.ciiva.com/29562/150060vs75000-29562919.pdf?src-supplier=Digi-Key, ComponentLink4Description=https://datasheet.ciiva.com/29562/150060vs75000-29562920.pdf?src-supplier=Digi-Key, ComponentLink4URL=https://datasheet.ciiva.com/29562/150060vs75000-29562920.pdf?src-supplier=Digi-Key, ComponentLink5Description=https://datasheet.ciiva.com/29562/150060vs75000-29562921.pdf?src-supplier=Digi-Key, ComponentLink5URL=https://datasheet.ciiva.com/29562/150060vs75000-29562921.pdf?src-supplier=Digi-Key, ComponentLink6Description=https://datasheet.ciiva.com/48430/150060vs75000-eng-tds-48430043.pdf?src-supplier=Distrelec, ComponentLink6URL=https://datasheet.ciiva.com/48430/150060vs75000-eng-tds-48430043.pdf?src-supplier=Distrelec, Dominant Wavelength=570nm, Height=0.7mm, Length=1.6mm, Lens Style=Clear,Rectangular, Luminous Intensity=40mcd, Manufacturer Part Number 1=150060VS75000, Mount="Surface Mount", Number of Pins=2, Packaging="Tape and Reel", Pricing 1="1=0.14000, 50=0.13300, 100=0.11400, 500=0.09900 (USD)", REACH SVHC=Unknown, RoHS=Yes, Stock 1=61699, Supplier 1=Digi-Key, Viewing Angle=140°, Wavelength=570nm, Width=0.8mm
M1 M2 M3 M4: library part M3_NONPLATED, "Non-plated mounting hole, M3"
P1: library part HDR3, "Header, 3-Pin", LatestRevisionDate=17-Jul-2002, LatestRevisionNote="Re-released for DXP Platform.", Publisher="Altium Limited"
P8: "Header, 2-Pin", LatestRevisionDate=17-Jul-2002, LatestRevisionNote="Re-released for DXP Platform.", Publisher="Altium Limited"
Q1: "Trans MOSFET N-CH 60V 0.26A 3-Pin SOT-23 T/R", Case/Package=SOT-23-3, Continuous Drain Current (ID)=260mA, Drain to Source Breakdown Voltage=60V, Drain to Source Resistance=2.5R, Gate to Source Voltage (Vgs)=20V, Input Capacitance=26.7pF, Manufacturer 1="ON Semiconductor", Max Operating Temperature=150°C, Max Power Dissipation=300mW, Min Operating Temperature=-55°C, Package Quantity=3000, Supplier Part Number 1=2N7002ET1GOSCT-ND, Threshold Voltage=1V, ComponentLink1Description=https://datasheet.ciiva.com/936/2n7002e-d-936787.pdf?src-supplier=Digi-Key, ComponentLink1URL=https://datasheet.ciiva.com/936/2n7002e-d-936787.pdf?src-supplier=Digi-Key, ComponentLink2Description=https://datasheet.ciiva.com/8059/2n7002e-d-8059427.pdf?src-supplier=Element14, ComponentLink2URL=https://datasheet.ciiva.com/8059/2n7002e-d-8059427.pdf?src-supplier=Element14, ComponentLink3Description=https://datasheet.ciiva.com/13060/2n7002e-d-105476-13060091.pdf?src-supplier=Mouser, ComponentLink3URL=https://datasheet.ciiva.com/13060/2n7002e-d-105476-13060091.pdf?src-supplier=Mouser, ComponentLink4Description=https://datasheet.ciiva.com/26146/2n7002e-d-26146200.pdf?src-supplier=Avnet+Europe, ComponentLink4URL=https://datasheet.ciiva.com/26146/2n7002e-d-26146200.pdf?src-supplier=Avnet+Europe, ComponentLink5Description=https://datasheet.ciiva.com/49018/70339334-49018202.pdf?src-supplier=Allied+Electronics, ComponentLink5URL=https://datasheet.ciiva.com/49018/70339334-49018202.pdf?src-supplier=Allied+Electronics, ComponentLink6Description=https://datasheet.ciiva.com/22641/1708226-22641627.pdf?src-supplier=Element14, ComponentLink6URL=https://datasheet.ciiva.com/22641/1708226-22641627.pdf?src-supplier=Element14, ComponentLink7Description=https://datasheet.ciiva.com/22641/1708226-22641628.pdf?src-supplier=Element14, ComponentLink7URL=https://datasheet.ciiva.com/22641/1708226-22641628.pdf?src-supplier=Element14, ComponentLink8Description=https://datasheet.ciiva.com/936/2n7002e-d-936788.pdf?src-supplier=Digi-Key, ComponentLink8URL=https://datasheet.ciiva.com/936/2n7002e-d-936788.pdf?src-supplier=Digi-Key, ComponentLink9Description=https://datasheet.ciiva.com/936/2n7002e-d-936789.pdf?src-supplier=Digi-Key, ComponentLink9URL=https://datasheet.ciiva.com/936/2n7002e-d-936789.pdf?src-supplier=Digi-Key, ComponentLink10Description=https://datasheet.ciiva.com/3304/2n7002e-d-3304389.pdf?src-supplier=Avnet, ComponentLink10URL=https://datasheet.ciiva.com/3304/2n7002e-d-3304389.pdf?src-supplier=Avnet, ComponentLink11Description=https://datasheet.ciiva.com/3304/2n7002e-d-3304390.pdf?src-supplier=Avnet, ComponentLink11URL=https://datasheet.ciiva.com/3304/2n7002e-d-3304390.pdf?src-supplier=Avnet, ComponentLink12Description=https://datasheet.ciiva.com/15198/getdatasheetpartid-53846-15198758.pdf?src-supplier=Verical, ComponentLink12URL=https://datasheet.ciiva.com/15198/getdatasheetpartid-53846-15198758.pdf?src-supplier=Verical, ComponentLink13Description=https://datasheet.ciiva.com/16305/2n7002e-d-16305452.pdf?src-supplier=Future+Electronics, ComponentLink13URL=https://datasheet.ciiva.com/16305/2n7002e-d-16305452.pdf?src-supplier=Future+Electronics, Element Configuration=Single, Fall Time=1.2ns, Halogen Free="Halogen Free", Height=0.94mm, Lead Free="Lead Free", Length=2.9mm, Manufacturer Part Number 1=2N7002ET1G, Nominal Vgs=1V, Number of Elements=1, Number of Pins=3, On-State Resistance=2.5R, Packaging="Tape and Reel", Power Dissipation=300mW, Pricing 1="1=0.18000, 10=0.16300, 25=0.15520, 100=0.06820, 250=0.06548, 500=0.05356, 1000=0.03720 (USD)", Radiation Hardening=No, Rds On Max=2.5R, REACH SVHC="No SVHC", Rise Time=1.2ns, RoHS=Yes, Stock 1=17179, Supplier 1=Digi-Key, Turn-Off Delay Time=4.8ns, Turn-On Delay Time=1.7ns, Width=1.3mm
Q2 Q3: "Trans MOSFET N-CH 40V 13A 8-Pin TDSON T/R", Continuous Drain Current (ID)=49A, Drain to Source Breakdown Voltage=40V, Drain to Source Resistance=9.3mR, Gate to Source Voltage (Vgs)=20V, Input Capacitance=1.9nF, Manufacturer 1=Infineon, Max Operating Temperature=150°C, Max Power Dissipation=35W, Min Operating Temperature=-55°C, Package Quantity=1, Power Dissipation=2.5W, Supplier Part Number 1=BSC093N04LSGATMA1CT-ND, Threshold Voltage=1.2V, ComponentLink1Description=https://datasheet.ciiva.com/6368/infineon-bsc093n04lsg-ds-v02-01-en-6368839.pdf?src-supplier=Digi-Key, ComponentLink1URL=https://datasheet.ciiva.com/6368/infineon-bsc093n04lsg-ds-v02-01-en-6368839.pdf?src-supplier=Digi-Key, ComponentLink2Description=https://datasheet.ciiva.com/6368/infineon-bsc093n04lsg-ds-v02-01-en-6368842.pdf?src-supplier=Digi-Key, ComponentLink2URL=https://datasheet.ciiva.com/6368/infineon-bsc093n04lsg-ds-v02-01-en-6368842.pdf?src-supplier=Digi-Key, ComponentLink3Description=https://datasheet.ciiva.com/6368/infineon-bsc093n04lsg-ds-v02-01-en-6368845.pdf?src-supplier=Digi-Key, ComponentLink3URL=https://datasheet.ciiva.com/6368/infineon-bsc093n04lsg-ds-v02-01-en-6368845.pdf?src-supplier=Digi-Key, ComponentLink4Description=https://datasheet.ciiva.com/11171/infineon-bsc093n04lsg-ds-v02-01-en-11171887.pdf?src-supplier=Avnet, ComponentLink4URL=https://datasheet.ciiva.com/11171/infineon-bsc093n04lsg-ds-v02-01-en-11171887.pdf?src-supplier=Avnet, Contact Plating=Tin,Matte, Drain to Source Voltage (Vdss)=40V, Element Configuration=Single, Fall Time=2.8ns, Halogen Free="Halogen Free", Height=1.1mm, Length=6.35mm, Manufacturer Part Number 1=BSC093N04LSG, Number of Pins=8, Packaging="Tape and Reel", Pricing 1="1=0.75000, 10=0.66400, 25=0.62360, 100=0.45270, 500=0.37826, 1000=0.32192, 2500=0.30180 (USD)", Rds On Max=9.3mR, REACH SVHC="No SVHC", Rise Time=2.4ns, RoHS=Yes, Stock 1=55136, Supplier 1=Digi-Key, Turn-Off Delay Time=16ns, Turn-On Delay Time=3.6ns, Width=5.35mm
Q4: "PMV40UN2 Series 30 V 44 mOhm 3.7 A SMT N-Channel TrenchMOS FET - TO-236AB", Manufacturer 1=Nexperia, Supplier Part Number 1=1727-1900-1-ND, ComponentLink1Description=http://www.farnell.com/datasheets/2242071.pdf?src-supplier=Farnell, ComponentLink1URL=http://www.farnell.com/datasheets/2242071.pdf?src-supplier=Farnell, ComponentLink2Description=http://www.farnell.com/datasheets/2242071.pdf?src-supplier=Newark, ComponentLink2URL=http://www.farnell.com/datasheets/2242071.pdf?src-supplier=Newark, ComponentLink3Description=http://www.farnell.com/datasheets/2242071.pdf?src-supplier=Element14, ComponentLink3URL=http://www.farnell.com/datasheets/2242071.pdf?src-supplier=Element14, Manufacturer Part Number 1=PMV40UN2R, Pricing 1="1=0.39000, 10=0.29300, 25=0.26400, 100=0.13920, 500=0.12336, 1000=0.09600 (USD)", RoHS=No, Stock 1=189039, Supplier 1=Digi-Key
R1 R2: library part 1M_0603_1%_1/10W, "Yageo RC Series Thick Film Surface Mount Resistor 0603 Case 1M 1% 0.1W 100ppm/C", Case/Package=0603, Case Code (Metric)=1608, Manufacturer 1=Yageo, Manufacturer Part Number 1=RC0603FR-071ML, Max Operating Temperature=155°C, Min Operating Temperature=-55°C, Package Quantity=5000, Power Rating=100mW, Resistance=1MR, Supplier Part Number 1=311-1.00MHRCT-ND, Temperature Coefficient=100ppm/°C, Tolerance=1%, Voltage Rating=50V, Case Code (Imperial)=0603, ComponentLink1Description=https://datasheet.ciiva.com/11819/0900766b80f96399-11819295.pdf?src-supplier=RSComponents, ComponentLink1URL=https://datasheet.ciiva.com/11819/0900766b80f96399-11819295.pdf?src-supplier=RSComponents, ComponentLink2Description=https://datasheet.ciiva.com/7983/443971-7983614.pdf?src-supplier=Element14, ComponentLink2URL=https://datasheet.ciiva.com/7983/443971-7983614.pdf?src-supplier=Element14, ComponentLink3Description=https://datasheet.ciiva.com/12555/rc0603-272842-12555388.pdf?src-supplier=Mouser, ComponentLink3URL=https://datasheet.ciiva.com/12555/rc0603-272842-12555388.pdf?src-supplier=Mouser, Composition="Thick Film", Depth=0.8mm, Height=0.45mm, Lead Free="Lead Free", Length=1.6mm, Military Standard=Not, Number of Pins=2, Packaging="Tape and Reel", Pricing 1="1=0.10000, 10=0.02200, 100=0.00900, 1000=0.00405, 2500=0.00352 (USD)", REACH SVHC="No SVHC", RoHS=Yes, Stock 1=1716035, Supplier 1=Digi-Key, Termination=SMD/SMT, Voltage Rating (DC)=50V, Width=0.8mm
R3 R5 R16: library part 10K_0603_1%_1/10W, "RES SMD 10K OHM 1% 1/10W 0603", Case/Package=0603, Case Code (Metric)=1608, Manufacturer 1=Yageo, Manufacturer Part Number 1=RC0603FR-0710KL, Max Operating Temperature=155°C, Min Operating Temperature=-55°C, Power Rating=100mW, Resistance=10kR, Supplier Part Number 1=311-10.0KHRDKR-ND, Temperature Coefficient=100ppm/°C, Tolerance=1%, Voltage Rating=75V, Voltage Rating (DC)=50V, Case Code (Imperial)=0603, ComponentLink1Description=https://datasheet.ciiva.com/7660/38590-7660789.pdf?src-supplier=Element14, ComponentLink1URL=https://datasheet.ciiva.com/7660/38590-7660789.pdf?src-supplier=Element14, ComponentLink2Description=https://datasheet.ciiva.com/15189/getdatasheetpartid-409289-15189591.pdf?src-supplier=Verical, ComponentLink2URL=https://datasheet.ciiva.com/15189/getdatasheetpartid-409289-15189591.pdf?src-supplier=Verical, ComponentLink3Description=https://datasheet.ciiva.com/46440/1868787-46440891.pdf?src-supplier=Element14, ComponentLink3URL=https://datasheet.ciiva.com/46440/1868787-46440891.pdf?src-supplier=Element14, ComponentLink4Description=https://datasheet.ciiva.com/7983/443971-7983596.pdf?src-supplier=Element14, ComponentLink4URL=https://datasheet.ciiva.com/7983/443971-7983596.pdf?src-supplier=Element14, ComponentLink5Description=https://datasheet.ciiva.com/7746/1738695-7746239.pdf?src-supplier=Element14, ComponentLink5URL=https://datasheet.ciiva.com/7746/1738695-7746239.pdf?src-supplier=Element14, ComponentLink6Description=https://datasheet.ciiva.com/22747/443971-22747519.pdf?src-supplier=Element14, ComponentLink6URL=https://datasheet.ciiva.com/22747/443971-22747519.pdf?src-supplier=Element14, Composition="Thick Film", Depth=0.8mm, Height=0.45mm, Lead Free="Lead Free", Lead Pitch=0.3mm, Length=1.6mm, Military Standard=Not, Number of Pins=2, Packaging="Tape and Reel", Pricing 1="1=0.10000, 10=0.02300, 100=0.00940, 1000=0.00421, 2500=0.00366 (USD)", REACH SVHC="No SVHC", RoHS=Yes, Stock 1=60214900, Supplier 1=Digi-Key, Termination=SMD/SMT, Weight=7.1E-05oz, Width=0.8mm